# EAGLE board servo (EAGLE 6.4)

Size 254.9 x 119.97 mm. Coordinates in mm from the lower left corner, seen from the top.
Outline: 94.9,19.97 254.9,19.97 254.9,119.97 94.9,119.97 94.9,19.97
Copper layers (1*16): Top 0.035mm / dielectric 1.5mm / Bottom 0.035mm
Design rules "default": minimum track width 10mil, minimum drill 24mil, track to track 8mil, track to pad 8mil, pad to pad 8mil, via to via 8mil, smd to smd 8mil, copper to edge 40mil, drill to drill 8mil, minimum pad ring 10mil, minimum via ring 8mil, stop-mask expansion 4mil, vias tented up to drill 0mil, thermal gap 10mil

## Footprints (pad centres in the part's own frame; a part is rotated, then mirrored left to right if it is on the bottom)
C1206 = smd 1.6 x 1.8: 1 -1.4,0; 2 1.4,0
C220 = smd 2 x 5: + 0,-4.6; - 0,4.6
C680 = smd 2.5 x 7: + 0,-6.7; - 0,6.7
C1206K = smd 1.5 x 2: 1 -1.5,0; 2 1.5,0
SH22,5 = drill 1.321 pad 2.54 long: 1 -11.252,0; 2 11.252,0
1X06 = drill 1.016 long: 1 -6.35,0; 2 -3.81,0; 3 -1.27,0; 4 1.27,0; 5 3.81,0; 6 6.35,0
WE-PD = smd 5.4 x 2.9: + 0,5; - 0,-5
SO08 = smd 0.635 x 1.27: A 0.635,2.54; B -0.635,2.54; DE 0.635,-2.54; DI 1.905,-2.54; GND 1.905,2.54; RE/ -0.635,-2.54; RO -1.905,-2.54; VCC -1.905,2.54
CSTER12M = smd 0.4 x 2.6: 1 -1.2,0; 2 0,0; 3 1.2,0
R1206 = smd 1.6 x 1.803: 1 -1.422,0; 2 1.422,0
M1206 = smd 1.6 x 2: 1 -1.4,0; 2 1.4,0
TO220 = drill 1 long: FB -1.7,15.895; GND 0,19.295; ON/OFF -3.4,19.295; VIN 3.4,19.295; VOUT 1.7,15.895 | smd 12 x 18: GNDB 0,4.5 | hole 3.2: 0,0
SCHOTTKY = smd 2.1 x 1.4: + 0,2.2; - 0,-2.2
TQFP44 = smd 1.5 x 0.4: 1 -5.8,4; 2 -5.8,3.2; 3 -5.8,2.4; 4 -5.8,1.6; 5 -5.8,0.8; 6 -5.8,0; 7 -5.8,-0.8; 8 -5.8,-1.6; 9 -5.8,-2.4; 10 -5.8,-3.2; 11 -5.8,-4; 23 5.8,-4; 24 5.8,-3.2; 25 5.8,-2.4; 26 5.8,-1.6; 27 5.8,-0.8; 28 5.8,0; 29 5.8,0.8; 30 5.8,1.6; 31 5.8,2.4; 32 5.8,3.2; 33 5.8,4 | smd 0.4 x 1.5: 12 -4,-5.8; 13 -3.2,-5.8; 14 -2.4,-5.8; 15 -1.6,-5.8; 16 -0.8,-5.8; 17 0,-5.8; 18 0.8,-5.8; 19 1.6,-5.8; 20 2.4,-5.8; 21 3.2,-5.8; 22 4,-5.8; 34 4,5.8; 35 3.2,5.8; 36 2.4,5.8; 37 1.6,5.8; 38 0.8,5.8; 39 0,5.8; 40 -0.8,5.8; 41 -1.6,5.8; 42 -2.4,5.8; 43 -3.2,5.8; 44 -4,5.8
87438-04 = smd 7 x 0.85: 1 0,2.25; 2 0,0.75; 3 0,-0.75; 4 0,-2.25

## Placement (x,y rotation side)
C1  2m2  [C1206]  61.88,70.77 0 top
C2  100n  [C1206]  68.23,70.77 0 top
C3  220uF  [C220]  35.21,7.27 0 top
C4  680uF  [C680]  21.24,9.81 0 top
C5  100n  [C1206]  3.46,-16.86 0 top  (outside the outline)
C6  2m2  [C1206]  9.81,-70.2 0 top  (outside the outline)
C7  100n  [C1206K]  25.05,-46.07 0 top  (outside the outline)
C8  100n  [C1206K]  3.46,-52.42 0 top  (outside the outline)
C9  100n  [C1206K]  8.54,-52.42 0 top  (outside the outline)
C10  100n  [C1206K]  13.62,-52.42 0 top  (outside the outline)
C11  100n  [C1206]  3.46,-70.2 0 top  (outside the outline)
F1  [SH22,5]  13.9,-99.03 0 top  (outside the outline)
JP1  [1X06]  14.89,-47.34 0 top  (outside the outline)
L1  [WE-PD]  6,6 0 top
N2  MAX485  [SO08]  54.26,63.15 0 top
N3  MAX485  [SO08]  121.57,74.58 0 top
Q2  CSTCR6M00G53Z  [CSTER12M]  3.46,-39.72 0 top  (outside the outline)
R1  10k  [R1206]  56.8,70.77 0 top
R2  1k  [R1206]  3.46,-4.16 0 top  (outside the outline)
R3  13.7k  [R1206]  3.46,-10.51 0 top  (outside the outline)
R4  10k  [R1206]  3.46,-76.55 0 top  (outside the outline)
R5  10R  [M1206]  3.46,-46.07 0 top  (outside the outline)
R6  10R  [M1206]  25.05,-39.72 0 top  (outside the outline)
R7  4k7  [M1206]  19.97,-39.72 0 top  (outside the outline)
U$1  LM2596  [TO220]  -7.1,-101.03 0 top  (outside the outline)
U$2  SCHOTTKY  [SCHOTTKY]  -15.1,-102.03 0 top  (outside the outline)
U$3  PIC24FJ64GA004_PRO  [TQFP44]  7.27,-29.56 0 top  (outside the outline)
X1  87438-04  [87438-04]  63.15,42.83 0 top
X2  87438-04  [87438-04]  6,-61.31 0 top  (outside the outline)

## Library data of the parts
C1 C2 C5 C6 C11 R1-R4 = resistor
C3 C4 L1 N2 N3 U$1 U$2 = Projekt
C7-C10 R5-R7 = rcl
F1 = fuse; MF: SCHURTER; MPN: 0031.8201; OC_FARNELL: 1162740; OC_NEWARK: 96F8317
JP1 = pinhead
Q2 = cstce-resonator; MPN: CSTCC12M0; OC_FARNELL: 1170434; OC_NEWARK: 25M8759
U$3 = microchip
X1 X2 = con-molex; OC_FARNELL: unknown; OC_NEWARK: unknown

## Nets
+3V3: C7.2 C9.2 JP1.2 R6.2 R7.2 U$3.28 U$3.40
+5V: C2.1 C11.1 N2.VCC N3.VCC R1.2 R4.2
+24V: F1.1
GND: C1.2 C2.2 C3.- C4.- C6.2 C7.1 C9.1 C10.2 C11.2 JP1.3 N2.GND N3.GND Q2.2 R2.2 R5.2 U$1.GND U$1.GNDB U$1.ON/OFF U$2.- U$3.6 U$3.29 U$3.39 X1.1 X2.1
MCLR: JP1.1 R7.1 U$3.18
N$1: N2.DE N2.RE/
N$2: N2.RO R1.1
N$3: N2.A X1.3
N$4: C8.2 R6.1 U$3.17
N$5: N2.B X1.4
N$6: N2.DI
N$7: C8.1 R5.1 U$3.16
N$8: C4.+ F1.2 U$1.VIN
N$9: C10.1 U$3.7
N$10: C5.1 R2.1 R3.2 U$1.FB
N$11: C5.2 L1.+ R3.1 U$1.VOUT U$2.+
N$12: N3.DE N3.RE/
N$13: N3.RO R4.1
N$14: N3.B X2.4
N$15: N3.DI
N$16: N3.A X2.3
OSC1: Q2.1 U$3.30
OSC2: Q2.3 U$3.31
PGC: JP1.5 U$3.22
PGD: JP1.4 U$3.21
VM: C1.1 C3.+ C6.1 L1.- X1.2 X2.2

## Tracks (layer width: path | path; a pad name or v marks a point on that pad's centre or on a via)
+3V3  (6 unrouted)
+5V  (5 unrouted)
GND  (23 unrouted)
MCLR  (2 unrouted)
N$1  (1 unrouted)
N$2  (1 unrouted)
N$3  (1 unrouted)
N$4  (2 unrouted)
N$5  (1 unrouted)
N$7  (2 unrouted)
N$8  (2 unrouted)
N$9  (1 unrouted)
N$10  (3 unrouted)
N$11  (4 unrouted)
N$12  (1 unrouted)
N$13  (1 unrouted)
N$14  (1 unrouted)
N$16  (1 unrouted)
OSC1  (1 unrouted)
OSC2  (1 unrouted)
PGC  (1 unrouted)
PGD  (1 unrouted)
VM  (5 unrouted)